# Altium PCB SPD Breakout V2.PcbDoc
Units mil, origin at the board's own origin, x right, y up, seen from the top; angles counter-clockwise.
Board outline 1820 x 2880 mil, 2 copper layers (Top Layer, Bottom Layer); 2 components, 128 nets, 222 pads, 8 vias.
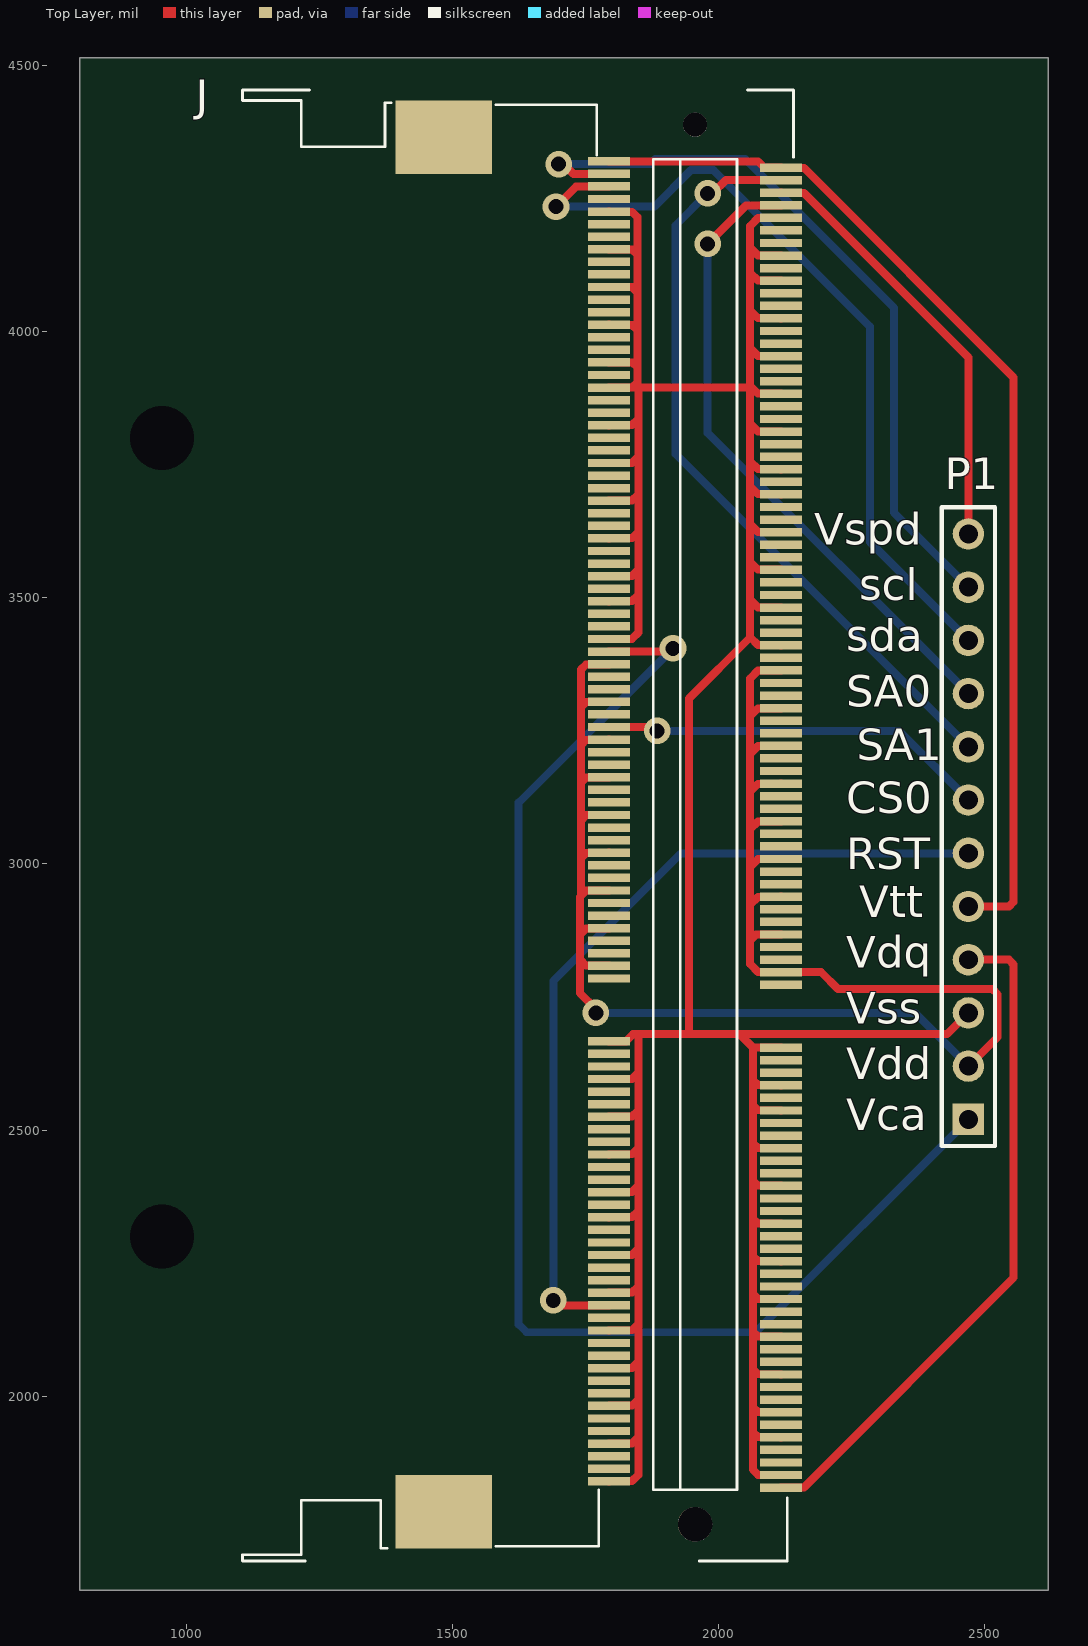
[diagram p0: Top Layer view]
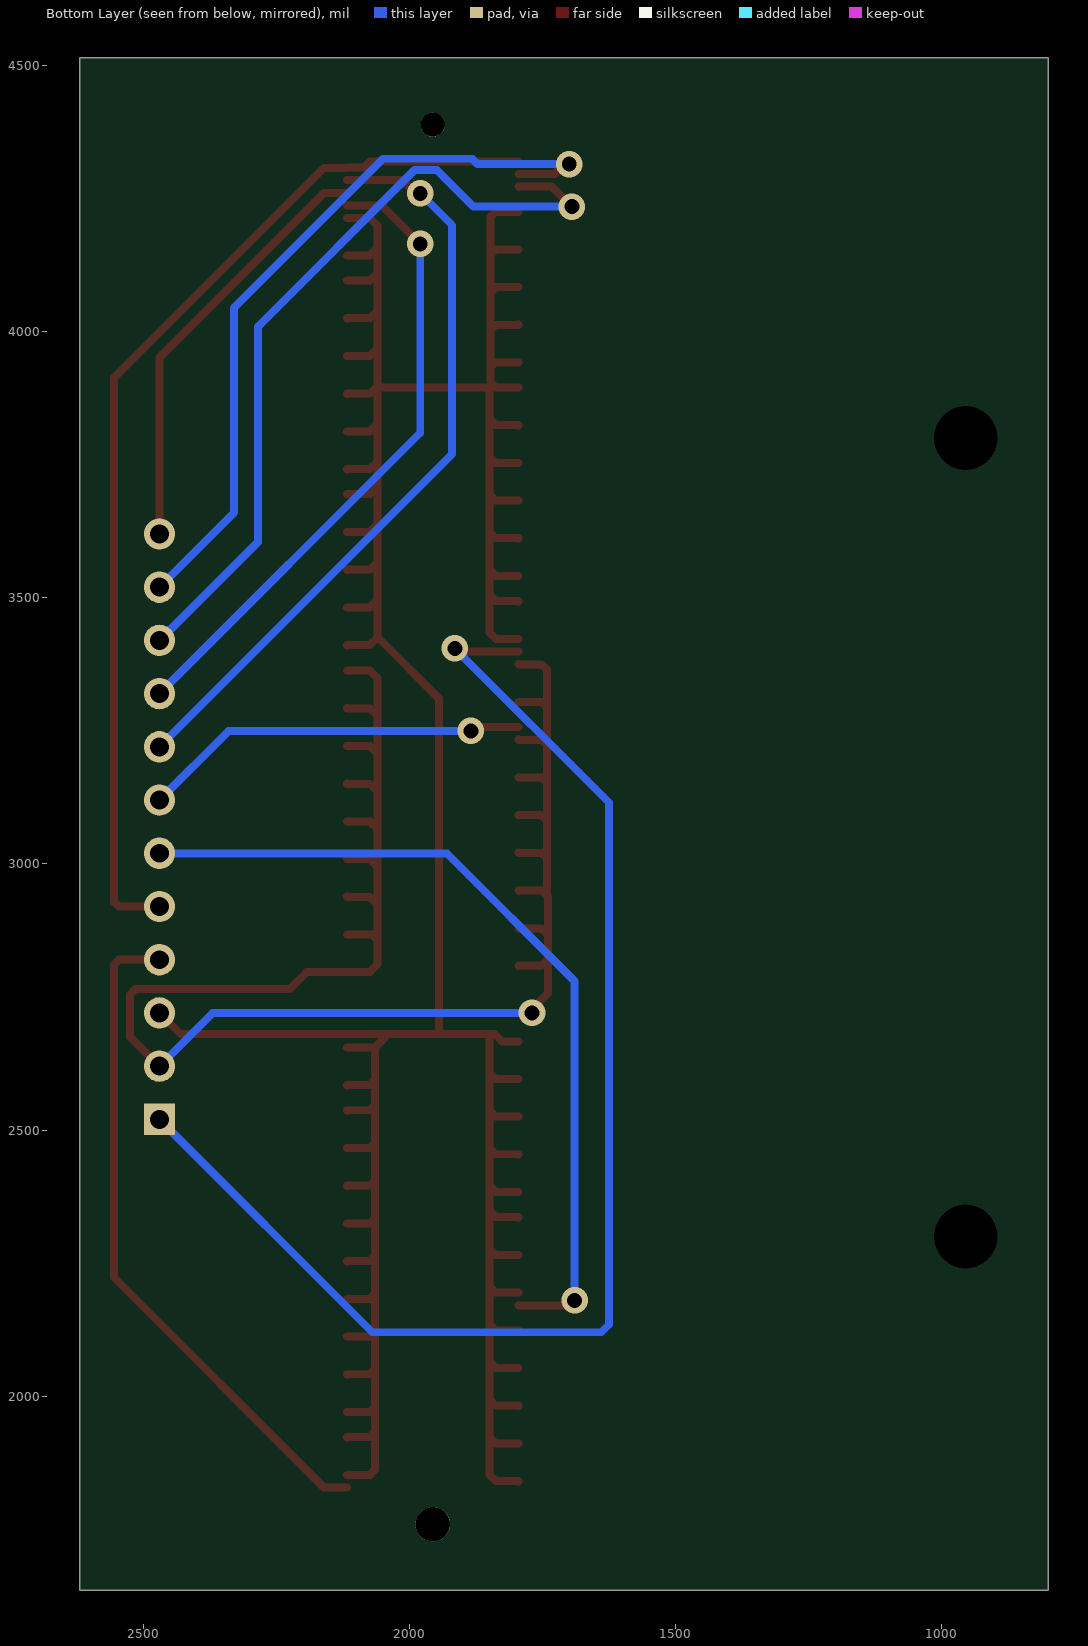
[diagram p1: Bottom Layer view, seen from below]

## Layer stack, top to bottom
Top Solder: solder mask 0.4, Solder Resist, Dk 3.5
Top Layer: signal copper 1.4
Dielectric 1: dielectric 12.6, FR-4, Dk 4.8
Bottom Layer: signal copper 1.4
Bottom Solder: solder mask 0.4, Solder Resist, Dk 3.5

## Board outline
800,1635 2620,1635 2620,4515 800,4515

## Design rules (kind name [scope] priority, off if disabled: settings)
Clearance [All] p1: gap=6 ignorepadtopadclearanceinfootprint=FALSE
PolygonConnect [All] p1: connectstyle=Relief reliefconductorwidth=10 reliefentries=4 polygonreliefangle="90 Angle" airgapwidth=10
RoutingVias [All] p1: holewidth=28 width=50 viastyle="Through Hole" minholewidth=28 minwidth=50 maxholewidth=28 maxwidth=50
SolderMaskExpansion [All] p1: expansion=4 istentingtop=FALSE
Width [All] p1: maxlimit=30 minlimit=6 preferedwidth=10 minimp=50.000000 maximp=50.000000 favimp=50.000000
30 further rules are at their usual default settings.

## Classes and differential pairs
net class DQ[63..0]: DQ0 DQ1 DQ2 DQ3 DQ4 DQ5 DQ6 DQ7 DQ8 DQ9 DQ10 DQ11 DQ12 DQ13 DQ14 DQ15 DQ16 DQ17 DQ18 DQ19 DQ20 DQ21 DQ22 DQ23 DQ24 DQ25 DQ26 DQ27 DQ28 DQ29 DQ30 DQ31 DQ32 DQ33 DQ34 DQ35 DQ36 DQ37 DQ38 DQ39 DQ40 DQ41 DQ42 DQ43 DQ44 DQ45 DQ46 DQ47 DQ48 DQ49 DQ50 DQ51 DQ52 DQ53 DQ54 DQ55 DQ56 DQ57 DQ58 DQ59 DQ60 DQ61 DQ62 DQ63
net class DM[7..0]: DM0 DM1 DM2 DM3 DM4 DM5 DM6 DM7
net class BA[2..0]: BA0 BA1 BA2
net class A[15..0]: A0 A1 A2 A3 A4 A5 A6 A7 A8 A9 A10 A11 A12 A13 A14 A15
component class "SPD Breakout V2": P1
component class "SPD BREAKOUT": J

## Components (designator, comment, footprint, x,y, rotation, side; value= is the part's Value field where it differs from the comment)
J "2013289-1" TE_2013289-1 1956.42,3072.2 r90 top
P1 "Header 12" HDR1X12 2470,2520 r90 top

## Footprints (in the part's own frame and the unit in brackets; to place one, negate y for a bottom-side part, rotate by r counter-clockwise, add the part's x,y. Pads: shape width x height; smd on the part's side, far side on the other; paste and mask are expansions set on the pad)
HDR1X12 [mm] "Connector; Header; 12 Position"
  rect 1.5x1.5 hole 0.9: 1(0,0)
  round 1.5 hole 0.9: 2(2.54,0) 3(5.08,0) 4(7.62,0) 5(10.16,0) 6(12.7,0) 7(15.24,0) 8(17.78,0) 9(20.32,0) 10(22.86,0) 11(25.4,0) 12(27.94,0)
  silkscreen extent -1.27,-1.27 29.21,1.27
TE_2013289-1 [mm]
  rect 0.4x2 smd: 1(-31.6,-4.1) 2(-31.3,4.1) 3(-31,-4.1) 4(-30.7,4.1) 5(-30.4,-4.1) 6(-30.1,4.1) 7(-29.8,-4.1) 8(-29.5,4.1) 9(-29.2,-4.1) 10(-28.9,4.1) 11(-28.6,-4.1) 12(-28.3,4.1) 13(-28,-4.1) 14(-27.7,4.1) 15(-27.4,-4.1) 16(-27.1,4.1) 17(-26.8,-4.1) 18(-26.5,4.1) 19(-26.2,-4.1) 20(-25.9,4.1) 21(-25.6,-4.1) 22(-25.3,4.1) 23(-25,-4.1) 24(-24.7,4.1) 25(-24.4,-4.1) 26(-24.1,4.1) 27(-23.8,-4.1) 28(-23.5,4.1) 29(-23.2,-4.1) 30(-22.9,4.1) 31(-22.6,-4.1) 32(-22.3,4.1) 33(-22,-4.1) 34(-21.7,4.1) 35(-21.4,-4.1) 36(-21.1,4.1) 37(-20.8,-4.1) 38(-20.5,4.1) 39(-20.2,-4.1) 40(-19.9,4.1) 41(-19.6,-4.1) 42(-19.3,4.1) 43(-19,-4.1) 44(-18.7,4.1) 45(-18.4,-4.1) 46(-18.1,4.1) 47(-17.8,-4.1) 48(-17.5,4.1) 49(-17.2,-4.1) 50(-16.9,4.1) 51(-16.6,-4.1) 52(-16.3,4.1) 53(-16,-4.1) 54(-15.7,4.1) 55(-15.4,-4.1) 56(-15.1,4.1) 57(-14.8,-4.1) 58(-14.5,4.1) 59(-14.2,-4.1) 60(-13.9,4.1) 61(-13.6,-4.1) 62(-13.3,4.1) 63(-13,-4.1) 64(-12.7,4.1) 65(-12.4,-4.1) 66(-12.1,4.1) 67(-11.8,-4.1) 68(-11.5,4.1) 69(-11.2,-4.1) 70(-10.9,4.1) 71(-10.6,-4.1) 72(-10.3,4.1) 73(-7.6,-4.1) 74(-7.3,4.1) 75(-7,-4.1) 76(-6.7,4.1) 77(-6.4,-4.1) 78(-6.1,4.1) 79(-5.8,-4.1) 80(-5.5,4.1) 81(-5.2,-4.1) 82(-4.9,4.1) 83(-4.6,-4.1) 84(-4.3,4.1) 85(-4,-4.1) 86(-3.7,4.1) 87(-3.4,-4.1) 88(-3.1,4.1) 89(-2.8,-4.1) 90(-2.5,4.1) 91(-2.2,-4.1) 92(-1.9,4.1) 93(-1.6,-4.1) 94(-1.3,4.1) 95(-1,-4.1) 96(-0.7,4.1) 97(-0.4,-4.1) 98(-0.1,4.1) 99(0.2,-4.1) 100(0.5,4.1) 101(0.8,-4.1) 102(1.1,4.1) 103(1.4,-4.1) 104(1.7,4.1) 105(2,-4.1) 106(2.3,4.1) 107(2.6,-4.1) 108(2.9,4.1) 109(3.2,-4.1) 110(3.5,4.1) 111(3.8,-4.1) 112(4.1,4.1) 113(4.4,-4.1) 114(4.7,4.1) 115(5,-4.1) 116(5.3,4.1) 117(5.6,-4.1) 118(5.9,4.1) 119(6.2,-4.1) 120(6.5,4.1) 121(6.8,-4.1) 122(7.1,4.1) 123(7.4,-4.1) 124(7.7,4.1) 125(8,-4.1) 126(8.3,4.1) 127(8.6,-4.1) 128(8.9,4.1) 129(9.2,-4.1) 130(9.5,4.1) 131(9.8,-4.1) 132(10.1,4.1) 133(10.4,-4.1) 134(10.7,4.1) 135(11,-4.1) 136(11.3,4.1) 137(11.6,-4.1) 138(11.9,4.1) 139(12.2,-4.1) 140(12.5,4.1) 141(12.8,-4.1) 142(13.1,4.1) 143(13.4,-4.1) 144(13.7,4.1) 145(14,-4.1) 146(14.3,4.1) 147(14.6,-4.1) 148(14.9,4.1) 149(15.2,-4.1) 150(15.5,4.1) 151(15.8,-4.1) 152(16.1,4.1) 153(16.4,-4.1) 154(16.7,4.1) 155(17,-4.1) 156(17.3,4.1) 157(17.6,-4.1) 158(17.9,4.1) 159(18.2,-4.1) 160(18.5,4.1) 161(18.8,-4.1) 162(19.1,4.1) 163(19.4,-4.1) 164(19.7,4.1) 165(20,-4.1) 166(20.3,4.1) 167(20.6,-4.1) 168(20.9,4.1) 169(21.2,-4.1) 170(21.5,4.1) 171(21.8,-4.1) 172(22.1,4.1) 173(22.4,-4.1) 174(22.7,4.1) 175(23,-4.1) 176(23.3,4.1) 177(23.6,-4.1) 178(23.9,4.1) 179(24.2,-4.1) 180(24.5,4.1) 181(24.8,-4.1) 182(25.1,4.1) 183(25.4,-4.1) 184(25.7,4.1) 185(26,-4.1) 186(26.3,4.1) 187(26.6,-4.1) 188(26.9,4.1) 189(27.2,-4.1) 190(27.5,4.1) 191(27.8,-4.1) 192(28.1,4.1) 193(28.4,-4.1) 194(28.7,4.1) 195(29,-4.1) 196(29.3,4.1) 197(29.6,-4.1) 198(29.9,4.1) 199(30.2,-4.1) 200(30.5,4.1) 201(30.8,-4.1) 202(31.1,4.1) 203(31.4,-4.1) 204(31.7,4.1)
  rect 3.5x4.6 smd: P$1(-32.75,12) P$2(32.85,12)
  round 1.65 hole 1.65 unplated: ""(-33.35,0)
  round 1.15 hole 1.15 unplated: ""(33.45,0)
  silkscreen extent -35.1,-4.7 35.1,21.6, body extent -35.75,-5.02 35.85,21.52, height 5.52

## Part data
J: "204 Position 0.6 mm Pitch Right Angle Surface Mount Socket DIMM Connector", Package=None, Centerline_Pitch=".6 mm[.024 in]", Digi-Key_Part_Number=A115021-ND, Digi-Key_Purchase_URL=https://www.digikey.com/product-detail/en/te-connectivity-amp-connectors/2013289-1/A115021-ND/2135546?utm_source=snapeda&utm_medium=aggregator&utm_campaign=symbol, MF="TE Connectivity", MP=2013289-1, Number_of_Positions=204, Product_Type=Socket, SnapEDA_Link=https://www.snapeda.com/parts/2013289-1/TE%20Connectivity%20AMP%20Connectors/view-part/231016/?ref=snap, TE_purchase_URL=https://www.te.com/usa-en/product-2013289-1.html?te_bu=Cor&te_type=disp&te_campaign=seda_glo_cor-seda-global-disp-prtnr-fy19-seda-model-bom-cta_sma-317_1&elqCampaignId=32493
P1: "Header, 12-Pin", LatestRevisionDate=17-Jul-2002, LatestRevisionNote="Re-released for DXP Platform.", Publisher="Altium Limited"

## Free pads (board coordinates)
  round 60 hole 120 unplated: 2(955,2300) 2(955,3800)

## Via types
v1: diameter 50, hole 28, Top Layer to Bottom Layer, 8 vias

## Nets (pads, with @x,y where several pads share a name; then routed paths per layer and width w, separated by ;. In a path a pad name is that pad's centre, name@x,y a point inside that pad or via, vN(x,y) a via of type N, cw(c..) or ccw(c..) an arc to the next point about the centre after c; other vN are vias at no path point)
A0: J.98
A1: J.97
A2: J.96
A3: J.95
A4: J.92
A5: J.91
A6: J.90
A7: J.86
A8: J.89
A9: J.85
A10: J.107
A11: J.84
A12: J.83
A13: J.119
A14: J.80
A15: J.78
BA0: J.109
BA1: J.108
BA2: J.79
CAS: J.115
CK0_N: J.103
CK0_P: J.101
CK1_N: J.104
CK1_P: J.102
CKE0: J.73
CS0: J.114 P1.7 | length 731.8
  Top Layer w15: J.114 1868.29,3257.24 1875.53,3250 v1(1885,3250)
  Bottom Layer w15: v1(1885,3250) 2340,3250 P1.7
DM0: J.11
DM1: J.28
DM2: J.46
DM3: J.63
DM4: J.136
DM5: J.153
DM6: J.170
DM7: J.187
DQ0: J.5
DQ1: J.7
DQ2: J.15
DQ3: J.17
DQ4: J.4
DQ5: J.6
DQ6: J.16
DQ7: J.18
DQ8: J.21
DQ9: J.23
DQ10: J.33
DQ11: J.35
DQ12: J.22
DQ13: J.24
DQ14: J.34
DQ15: J.36
DQ16: J.39
DQ17: J.41
DQ18: J.51
DQ19: J.53
DQ20: J.40
DQ21: J.42
DQ22: J.50
DQ23: J.52
DQ24: J.57
DQ25: J.59
DQ26: J.67
DQ27: J.69
DQ28: J.56
DQ29: J.58
DQ30: J.68
DQ31: J.70
DQ32: J.129
DQ33: J.131
DQ34: J.141
DQ35: J.143
DQ36: J.130
DQ37: J.132
DQ38: J.140
DQ39: J.142
DQ40: J.147
DQ41: J.149
DQ42: J.157
DQ43: J.159
DQ44: J.146
DQ45: J.148
DQ46: J.158
DQ47: J.160
DQ48: J.163
DQ49: J.165
DQ50: J.175
DQ51: J.177
DQ52: J.164
DQ53: J.166
DQ54: J.174
DQ55: J.176
DQ56: J.181
DQ57: J.183
DQ58: J.191
DQ59: J.193
DQ60: J.180
DQ61: J.182
DQ62: J.192
DQ63: J.194
DQS0_N: J.10
DQS0_P: J.12
DQS1_N: J.27
DQS1_P: J.29
DQS2_N: J.45
DQS2_P: J.47
DQS3_N: J.62
DQS3_P: J.64
DQS4_N: J.135
DQS4_P: J.137
DQS5_N: J.152
DQS5_P: J.154
DQS6_N: J.169
DQS6_P: J.171
DQS7_N: J.186
DQS7_P: J.188
ODT0: J.116
RAS: J.110
RESET: J.30 P1.6 | length 1588.3
  Top Layer w15: v1(1690,2180) 1699.47,2180 1708.84,2170.63 J.30
  Bottom Layer w15: v1(1690,2180) 1690,2780 1930,3020 P1.6
SA0: J.197 P1.9 | length 1215.9
  Top Layer w15: v1(1980,4165) 2052.18,4237.19 2117.46,4237.19 J.197
  Bottom Layer w15: v1(1980,4165) 1980,3810 P1.9
SA1: J.201 P1.8 | length 1440.8
  Top Layer w15: v1(1980,4260) 1989.47,4260 2014.27,4284.8 J.201
  Bottom Layer w15: v1(1980,4260) 1920,4200 1920,3770 P1.8
SCL: J.202 P1.11 | length 1435.7
  Top Layer w15: v1(1700,4315) 1709.47,4315 1727.86,4296.61 J.202
  Bottom Layer w15: v1(1700,4315) 1872.24,4315 1882.24,4325 2050,4325 2330,4045 2330,3660 P1.11
SDA: J.200 P1.10 | length 1522.2
  Top Layer w15: v1(1695,4235) 1732.99,4272.99 J.200
  Bottom Layer w15: v1(1695,4235) 1880,4235 1948.79,4303.79 1990.66,4303.79 2285,4009.45 2285,3605 P1.10
Vdd: J.75 J.76 J.81 J.82 J.87 J.88 J.93 J.94 J.99 J.100 J.105 J.106 J.111 J.112 J.117 J.118 J.123 J.124 P1.2 | length 3613.8
  Top Layer w15: v1(1770,2720) 1770,2727.18 1740,2757.18 1740,2820.71 ; J.76 1794.63,2808.8 1751.91,2808.8 1740,2820.71 ; J.82 1794.63,2878.92 1751.91,2878.92 1740,2867.01 ; J.88 1794.63,2949.78 1751.91,2949.78 1742.13,2940 ; J.94 1794.63,3020.65 1751.91,3020.65 1742.13,3010.87 ; J.100 1794.63,3091.52 1751.91,3091.52 1742.13,3081.73 ; J.106 1794.63,3162.38 1751.91,3162.38 1742.13,3152.6 ; J.112 1794.63,3233.25 1751.91,3233.25 1742.13,3223.47 ; J.118 1794.63,3304.11 1751.91,3304.11 1742.13,3294.33 ; J.124 1794.63,3374.98 1751.91,3374.98 1742.13,3365.2 1742.13,3294.33 ; J.81 2117.46,2867.11 2070.89,2867.11 2060,2856.21 ; J.87 2117.46,2937.97 2074.75,2937.97 2060,2923.23 ; J.93 2117.46,3008.84 2074.75,3008.84 2060,2994.09 ; J.99 2117.46,3079.7 2074.75,3079.7 2060,3064.96 ; J.105 2117.46,3150.57 2074.75,3150.57 2060,3135.82 ; J.111 2117.46,3221.44 2074.75,3221.44 2060,3206.69 ; J.117 2117.46,3292.3 2074.75,3292.3 2060,3277.56 ; J.123 2117.46,3363.17 2074.75,3363.17 2060,3348.42 2060,3277.56 ; P1.2 2525,2675 2525,2755 2515,2765 2225,2765 2193.39,2796.61 J.75 2117.46,2796.99 2074.75,2796.99 2060,2811.73 2060,2856.21 ; 1740,2820.71 1740,2867.01 ; 1740,2867.01 1740,2937.87 1742.13,2940 ; 1742.13,2940 1742.13,3010.87 ; 1742.13,3010.87 1742.13,3081.73 ; 1742.13,3081.73 1742.13,3152.6 ; 1742.13,3152.6 1742.13,3223.47 ; 1742.13,3223.47 1742.13,3294.33 ; 2060,2856.21 2060,2923.23 ; 2060,2923.23 2060,2994.09 ; 2060,2994.09 2060,3064.96 ; 2060,3064.96 2060,3135.82 ; 2060,3135.82 2060,3206.69 ; 2060,3206.69 2060,3277.56
  Bottom Layer w15: v1(1770,2720) 2370,2720 P1.2
Vddspd: J.199 P1.12 | length 812.1
  Top Layer w15: J.199 2118.21,4260.81 2160.92,4260.81 2470,3951.73 P1.12
Vrefca: J.126 P1.1 | length 2529.5
  Top Layer w15: J.126 1795.37,3399.35 1909.35,3399.35 v1(1915,3405)
  Bottom Layer w15: v1(1915,3405) 1625,3115 1625,2135 1640,2120 2070,2120 P1.1
Vrefdq: J.1 P1.4 | length 1277.8
  Top Layer w15: J.1 2118.21,1828.48 2160.92,1828.48 2555,2222.56 2555,2811.21 2546.21,2820 P1.4
Vss: J.2 J.3 J.8 J.9 J.13 J.14 J.19 J.20 J.25 J.26 J.31 J.32 J.37 J.38 J.43 J.44 J.48 J.49 J.54 J.55 J.60 J.61 J.65 J.66 J.71 J.72 J.127 J.128 J.133 J.134 J.138 J.139 J.144 J.145 J.150 J.151 J.155 J.156 J.161 J.162 J.167 J.168 J.172 J.173 J.178 J.179 J.184 J.185 J.189 J.190 J.195 J.196 P1.3 | length 7968.3
  Top Layer w15: J.2 1795.37,1840.3 1838.09,1840.3 1850,1852.21 1850,1923.07 ; J.8 1795.37,1911.16 1838.09,1911.16 1850,1923.07 ; J.14 1795.37,1982.03 1838.09,1982.03 1850,1993.94 ; J.20 1795.37,2052.89 1838.09,2052.89 1850,2064.81 ; J.26 1795.37,2123.76 1838.09,2123.76 1850,2135.67 ; J.32 1795.37,2194.63 1838.09,2194.63 1850,2206.54 ; J.38 1795.37,2265.49 1838.09,2265.49 1850,2277.4 ; J.44 1795.37,2336.36 1838.09,2336.36 1850,2348.27 ; J.48 1795.37,2383.6 1838.09,2383.6 1850,2395.51 ; J.54 1795.37,2454.47 1838.09,2454.47 1850,2466.38 ; J.60 1795.37,2525.33 1838.09,2525.33 1850,2537.25 ; J.66 1795.37,2596.2 1838.09,2596.2 1850,2608.11 ; J.72 1826.5,2666.69 1839.8,2680 1850,2680 ; J.128 1795.37,3422.97 1838.09,3422.97 1850,3434.88 1850,3505.75 ; J.134 1795.37,3493.84 1838.09,3493.84 1850,3505.75 ; J.138 1795.37,3541.08 1838.09,3541.08 1850,3552.99 ; J.144 1795.37,3611.95 1838.09,3611.95 1850,3623.86 ; J.150 1795.37,3682.81 1838.09,3682.81 1850,3694.73 ; J.156 1795.37,3753.68 1838.09,3753.68 1850,3765.59 ; J.162 1795.37,3824.55 1838.09,3824.55 1850,3836.46 ; J.168 1850,3895.04 ; J.172 1795.37,3941.91 1839.08,3941.91 1847.87,3933.12 ; J.178 1795.37,4012.78 1838.09,4012.78 1847.87,4002.99 ; J.184 1795.37,4083.64 1838.09,4083.64 1847.87,4073.86 ; J.190 1795.37,4154.51 1838.09,4154.51 1847.87,4144.73 ; J.196 1795.37,4225.37 1838.09,4225.37 1847.87,4215.59 1847.87,4144.73 ; 1838.09,3895.41 1847.87,3905.2 1847.87,3933.12 ; J.3 2117.46,1852.11 2074.75,1852.11 2064.96,1861.89 2064.96,1932.75 ; J.9 2117.46,1922.97 2074.75,1922.97 2064.96,1932.75 ; J.13 2117.46,1970.22 2074.75,1970.22 2064.96,1980 ; J.19 2117.46,2041.08 2074.75,2041.08 2064.96,2050.86 ; J.25 2117.46,2111.95 2074.75,2111.95 2064.96,2121.73 ; J.31 2117.46,2182.81 2074.75,2182.81 2064.96,2192.6 ; J.37 2117.46,2253.68 2074.75,2253.68 2064.96,2263.46 ; J.43 2117.46,2324.55 2074.75,2324.55 2064.96,2334.33 ; J.49 2117.46,2395.41 2074.75,2395.41 2064.96,2405.2 ; J.55 2117.46,2466.28 2074.75,2466.28 2064.96,2476.06 ; J.61 2117.46,2537.15 2074.75,2537.15 2064.96,2546.93 ; J.65 2117.46,2584.39 2074.75,2584.39 2064.96,2594.17 ; J.71 2117.72,2655 2065,2655 ; J.127 2117.46,3411.16 2074.75,3411.16 2060,3425.91 ; J.133 2117.46,3482.03 2074.75,3482.03 2060,3496.77 ; J.139 2117.46,3552.89 2074.75,3552.89 2060,3567.64 ; J.145 2117.46,3623.76 2074.75,3623.76 2060,3638.51 ; J.151 2117.46,3694.63 2074.75,3694.63 2060,3709.37 ; J.155 2117.46,3741.87 2074.75,3741.87 2060,3756.62 ; J.161 2117.46,3812.74 2074.75,3812.74 2060,3827.48 ; J.167 2117.46,3883.6 2074.75,3883.6 2060,3898.35 ; J.173 2117.46,3954.47 2074.75,3954.47 2060,3969.22 ; J.179 2117.46,4025.33 2074.75,4025.33 2060,4040.08 ; J.185 2117.46,4096.2 2074.75,4096.2 2060,4110.95 ; J.189 2117.46,4143.44 2074.75,4143.44 2060,4158.19 ; J.195 2117.46,4213.56 2074.75,4213.56 2060,4198.82 2060,4158.19 ; P1.3 2430,2680 2040,2680 ; 1847.87,3933.12 1847.87,4002.99 ; 1847.87,4002.99 1847.87,4073.86 ; 1847.87,4073.86 1847.87,4144.73 ; 1850,1923.07 1850,1993.94 ; 1850,1993.94 1850,2064.81 ; 1850,2064.81 1850,2135.67 ; 1850,2135.67 1850,2206.54 ; 1850,2206.54 1850,2277.4 ; 1850,2277.4 1850,2348.27 ; 1850,2348.27 1850,2395.51 ; 1850,2395.51 1850,2466.38 ; 1850,2466.38 1850,2537.25 ; 1850,2537.25 1850,2608.11 ; 1850,2608.11 1850,2680 ; 1850,2680 1945,2680 ; 1850,3505.75 1850,3552.99 ; 1850,3552.99 1850,3623.86 ; 1850,3623.86 1850,3694.73 ; 1850,3694.73 1850,3765.59 ; 1850,3765.59 1850,3836.46 ; 1850,3836.46 1850,3895.04 ; 1850,3895.04 2056.69,3895.04 2060,3898.35 ; 1945,2680 2040,2680 ; 1945,2680 1945,3310.91 2060,3425.91 ; 2040,2680 2065,2655 ; 2060,3425.91 2060,3496.77 ; 2060,3496.77 2060,3567.64 ; 2060,3567.64 2060,3638.51 ; 2060,3638.51 2060,3709.37 ; 2060,3709.37 2060,3756.62 ; 2060,3756.62 2060,3827.48 ; 2060,3827.48 2060,3898.35 ; 2060,3898.35 2060,3969.22 ; 2060,3969.22 2060,4040.08 ; 2060,4040.08 2060,4110.95 ; 2060,4110.95 2060,4158.19 ; 2064.96,1932.75 2064.96,1980 ; 2064.96,1980 2064.96,2050.86 ; 2064.96,2050.86 2064.96,2121.73 ; 2064.96,2121.73 2064.96,2192.6 ; 2064.96,2192.6 2064.96,2263.46 ; 2064.96,2263.46 2064.96,2334.33 ; 2064.96,2334.33 2064.96,2405.2 ; 2064.96,2405.2 2064.96,2476.06 ; 2064.96,2476.06 2064.96,2546.93 ; 2064.96,2546.93 2064.96,2594.17 ; 2064.96,2594.17 2064.96,2654.96 2065,2655
Vtt: J.203 J.204 P1.5 | length 2002.1
  Top Layer w15: J.204 2074.53,4320.24 2086.34,4308.43 J.203 2118.21,4308.05 2160.92,4308.05 2555,3913.97 2555,2928.79 2546.21,2920 P1.5
WE: J.113
pads on no net: J. J.74 J.77 J.120 J.121 J.122 J.125 J.198 J.P$1 J.P$2

## Silkscreen, mask and mechanical layers (free items; w line width, h text height)
Top Overlay:
  text "Vspd" at 2180,3599.99 h60
  text "scl" at 2265,3495 h60
  text "sda" at 2240,3400 h60
  text "SA0" at 2240,3295 h60
  text "SA1" at 2260,3195 h60
  text "CS0" at 2240,3095 h60
  text "RST" at 2240,2990 h60
  text "Vtt" at 2265,2900 h60
  text "Vdq" at 2240,2804.99 h60
  text "Vss" at 2240,2700 h60
  text "Vdd" at 2240,2595 h60
  text "Vca" at 2240,2500 h60